# Altium PCB BeagleBone_Black_RevB4_V2.PcbDoc (part 2 of 3)
Units mm, origin at the board's own origin, x right, y up, seen from the top; angles counter-clockwise.
Board outline 100 x 100 mm, 2 copper layers (Top Layer, Bottom Layer); 274 components, 245 nets, 1313 pads, 251 vias.
Unrouted connection lines stored in the file: 891.
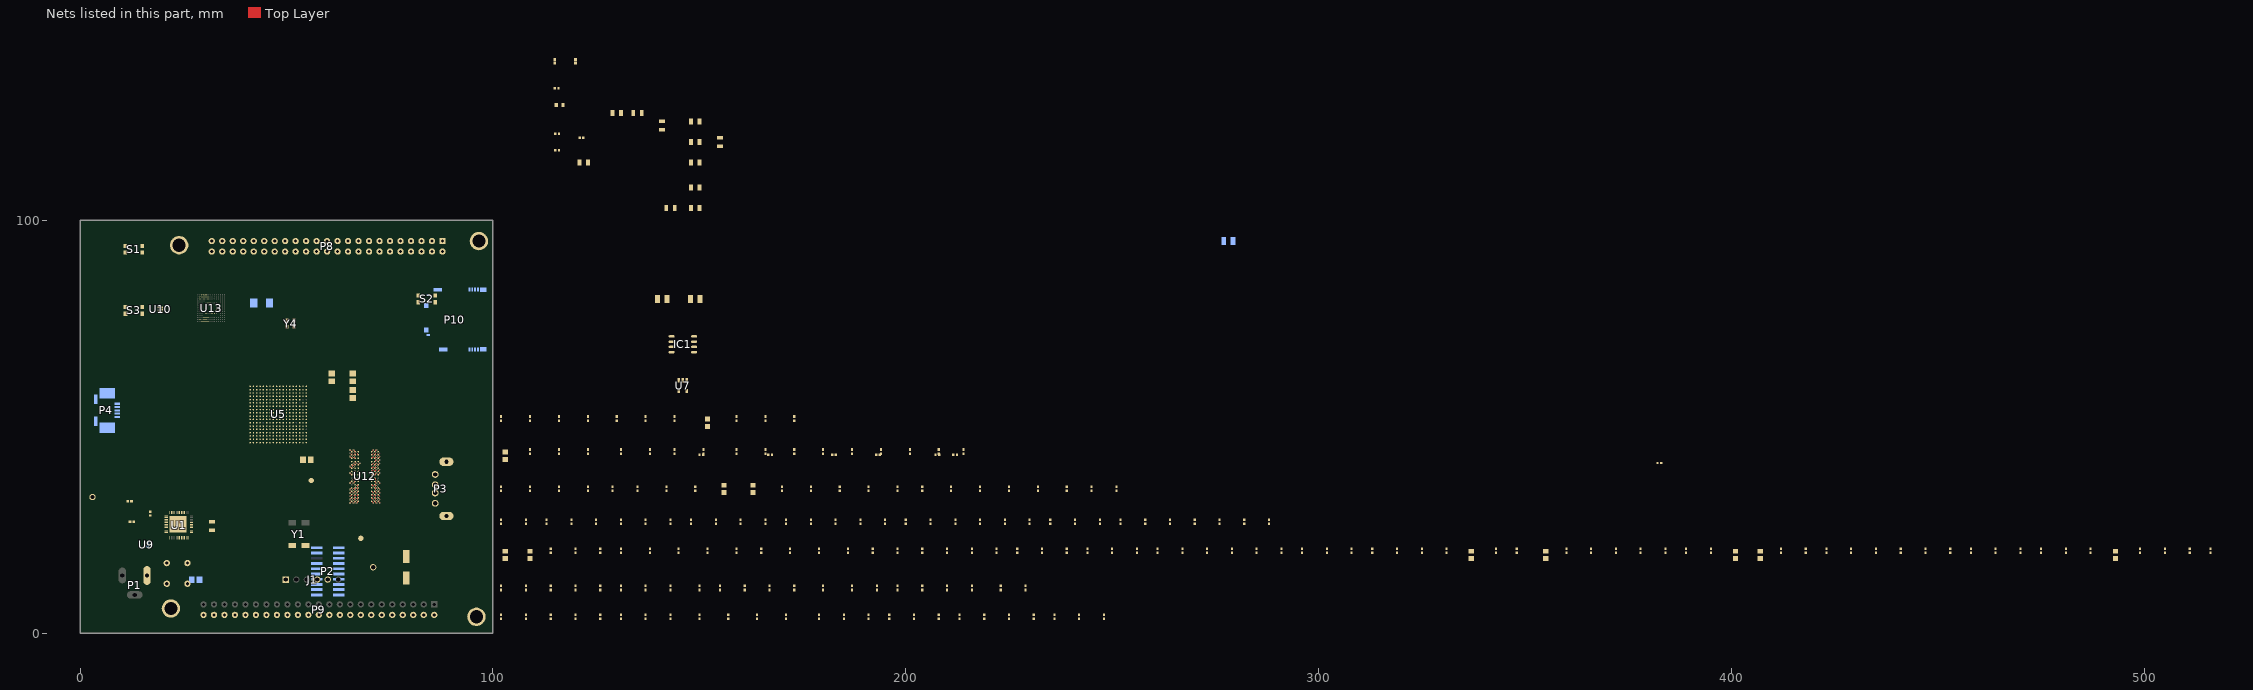
[diagram p2: the nets of this part, all layers, seen from the top]

## Part data (continued)
C27 C28 C29 C30 C31 C33 C35 C36 C37 C38 C41 C42 C43 C44 C45 C46 C47 C48 C49 C50 C51 C52 C53 C54 C56 C57 C58 C59 C60 C61 C63 C64 C65 C66 C67 C68 C69 C70 C71 C72 C73 C74 C75 C76 C78 C79 C80 C81 C82 C83 C84 C85 C86 C87 C88 C92 C93 C94 C97 C98 C99 C100 C101 C102 C103 C105 C106 C152 C154 C155 C158 C159: library part "CAP_0.1uF_X7R_16V_10% 0402", "CAP CER 0.1UF 6.3V 10% X5R 0402", Capacitance=0.1µF, Manufacturer="TDK Corporation", Manufacturer Part Number=C1005X5R0J104K050BA, Operating Temperature="-55°C ~ 85°C", Package / Case="0402 (1005 Metric)", Ratings=-, Supplier Part Number 1=445-1266-6-ND, Temperature Coefficient=X5R, Tolerance=±10%, Voltage - Rated=6.3V, Applications="General Purpose", Category=Capacitors, Features=-, Height - Seated (Max)=-, Lead Spacing=-, Lead Style=-, Mounting Type="Surface Mount, MLCC", Packaging=Digi-Reel®, Pricing 1="1=0.1, 10=0.026, 100=0.0121, 250=0.00992, 500=0.00848, 1000=0.0066, 5000=0.0055 (USD)", RoHS="RoHS Compliant", Size / Dimension="0.039\" L x 0.020\" W (1.00mm x 0.50mm)", Supplier 1=Digi-Key, Thickness (Max)="0.022\" (0.55mm)"
  C27 C28 C29 C158 C159: ComponentLink1Description=http://product.tdk.com/capacitor/mlcc/en/documents/mlcc_commercial_general_en.pdf, ComponentLink1URL=http://product.tdk.com/capacitor/mlcc/en/documents/mlcc_commercial_general_en.pdf, Stock 1=137886
  C30 C31 C33 C35 C36 C155: ComponentLink1Description=http://product.tdk.com/capacitor/mlcc/en/documents/mlcc_commercial_general_en.pdf, ComponentLink1URL=http://product.tdk.com/capacitor/mlcc/en/documents/mlcc_commercial_general_en.pdf, Stock 1=127604
  C37 C38 C41 C42 C43 C44 C45 C46 C47 C48 C49 C50 C51 C52 C53 C54 C56 C57 C58 C59 C60 C61 C63 C64 C65 C66 C67 C68 C69 C70 C71 C72 C73 C74 C75 C76 C78 C79 C80 C81 C82 C83 C84 C85 C86 C87 C88 C92 C93 C94 C97 C98 C99 C100 C101 C102 C103 C105 C106: ComponentLink1Description=http://www.kemet.com/datasheets&C0402C104K4RACTU, ComponentLink1URL=http://www.kemet.com/datasheets&C0402C104K4RACTU, Stock 1=127604
  C152 C154: ComponentLink1Description=http://product.tdk.com/capacitor/mlcc/en/documents/mlcc_commercial_general_en.pdf, ComponentLink1URL=http://product.tdk.com/capacitor/mlcc/en/documents/mlcc_commercial_general_en.pdf, Stock 1=127094
C32: library part CAP_0.001_X7R_50V_5%_0402, "CAP CER 1000PF 16V 10% X7R 0402", Capacitance=1000pF, Manufacturer=Yageo, Manufacturer Part Number=CC0402KRX7R7BB102, Operating Temperature="-55°C ~ 125°C", Package / Case="0402 (1005 Metric)", Ratings=-, Supplier Part Number 1=311-1352-6-ND, Temperature Coefficient=X7R, Tolerance=±10%, Voltage - Rated=16V, Applications="General Purpose", Category=Capacitors, ComponentLink1Description=http://www.yageo.com/documents/recent/UPY-GPHC_X7R_6.3V-to-50V_8.pdf, ComponentLink1URL=http://www.yageo.com/documents/recent/UPY-GPHC_X7R_6.3V-to-50V_8.pdf, Features=-, Height - Seated (Max)=-, Lead Spacing=-, Lead Style=-, Mounting Type="Surface Mount, MLCC", Packaging=Digi-Reel®, Pricing 1="1=0.1, 10=0.012, 25=0.0088, 100=0.0057, 250=0.00464, 500=0.00396, 1000=0.00309, 2500=0.00278, 5000=0.00258 (USD)", RoHS="RoHS Compliant", Size / Dimension="0.039\" L x 0.020\" W (1.00mm x 0.50mm)", Stock 1=394472, Supplier 1=Digi-Key, Thickness (Max)="0.022\" (0.55mm)"
C34: library part "CAP SMD", "CAP ALUM 100UF 6.3V 20% SMD", Capacitance=100µF, ESR (Equivalent Series Resistance)="4.64 Ohm", Lifetime @ Temp.="2000 Hrs @ 85°C", Manufacturer="Cornell Dubilier Electronics (CDE)", Manufacturer Part Number=AVE107M06D16T-F, Operating Temperature="-40°C ~ 85°C", Package / Case="Radial, Can - SMD", Ripple Current=120mA, Supplier Part Number 1=338-1787-6-ND, Tolerance=±20%, Voltage Rating=6.3V, Category=Capacitors, ComponentLink1Description=http://www.cde.com/catalogs/AVE.pdf, ComponentLink1URL=http://www.cde.com/catalogs/AVE.pdf, Features="General Purpose", Height - Seated (Max)="0.209\" (5.30mm)", Impedance=-, Lead Spacing=-, Mounting Type="Surface Mount", Packaging=Digi-Reel®, Pricing 1="1=0.17, 10=0.16, 100=0.133, 250=0.11844, 500=0.0987 (USD)", RoHS="RoHS Compliant", Size / Dimension="0.248\" Dia (6.30mm)", Stock 1=2601, Supplier 1=Digi-Key, Surface Mount Land Size="0.260\" L x 0.260\" W (6.60mm x 6.60mm)"
C39 C40 C55 C62 C77 C95 C96 C153: library part CAP_10uF_Y5V_10V_10%_0805, "CAP CER 10UF 10V Y5V 0805", Capacitance=10µF, Manufacturer="TDK Corporation", Manufacturer Part Number=C2012Y5V1A106Z, Operating Temperature="-30°C ~ 85°C", Package / Case="0805 (2012 Metric)", Ratings=-, Supplier Part Number 1=445-1371-6-ND, Temperature Coefficient="Y5V (F)", Tolerance="-20%, +80%", Voltage - Rated=10V, Applications="General Purpose", Category=Capacitors, ComponentLink1Description=http://media.digikey.com/pdf/Data%20Sheets/TDK%20PDFs/C_Series_GeneralAppl_B11.pdf, ComponentLink1URL=http://media.digikey.com/pdf/Data%20Sheets/TDK%20PDFs/C_Series_GeneralAppl_B11.pdf, Features=-, Height - Seated (Max)=-, Lead Spacing=-, Lead Style=-, Mounting Type="Surface Mount, MLCC", Packaging=Digi-Reel®, Pricing 1="1=0.15, 10=0.105, 100=0.0499, 250=0.042, 500=0.03518, 1000=0.02887 (USD)", RoHS="RoHS Compliant", Size / Dimension="0.079\" L x 0.049\" W (2.00mm x 1.25mm)", Stock 1=111942, Supplier 1=Digi-Key, Thickness (Max)="0.057\" (1.45mm)"
C107 C108 C109 C110 C111 C112 C113 C114 C115 C116 C117 C119 C120 C121 C124: library part CAP_0.01uf_X7R_16V_10%_0402, "CAP CER 0.1UF 6.3V 10% X5R 0402", Capacitance=0.1µF, Manufacturer="TDK Corporation", Manufacturer Part Number=C1005X5R0J104K050BA, Operating Temperature="-55°C ~ 85°C", Package / Case="0402 (1005 Metric)", Ratings=-, Supplier Part Number 1=445-1266-6-ND, Temperature Coefficient=X5R, Tolerance=±10%, Voltage - Rated=6.3V, Applications="General Purpose", Category=Capacitors, ComponentLink1Description=http://www.kemet.com/datasheets&C0402C104K4RACTU, ComponentLink1URL=http://www.kemet.com/datasheets&C0402C104K4RACTU, Features=-, Height - Seated (Max)=-, Lead Spacing=-, Lead Style=-, Mounting Type="Surface Mount, MLCC", Packaging=Digi-Reel®, Pricing 1="1=0.1, 10=0.026, 100=0.0121, 250=0.00992, 500=0.00848, 1000=0.0066, 5000=0.0055 (USD)", RoHS="RoHS Compliant", Size / Dimension="0.039\" L x 0.020\" W (1.00mm x 0.50mm)", Stock 1=127604, Supplier 1=Digi-Key, Thickness (Max)="0.022\" (0.55mm)"
C118 C122 C126: library part CAP_4.7uF_X5R_6.3V_10%_0603, "CAP CER 10UF 10V Y5V 0805", Capacitance=10µF, Manufacturer="TDK Corporation", Manufacturer Part Number=C2012Y5V1A106Z, Operating Temperature="-30°C ~ 85°C", Package / Case="0805 (2012 Metric)", Ratings=-, Supplier Part Number 1=445-1371-6-ND, Temperature Coefficient="Y5V (F)", Tolerance="-20%, +80%", Voltage - Rated=10V, Applications="General Purpose", Category=Capacitors, ComponentLink1Description=http://media.digikey.com/pdf/Data%20Sheets/TDK%20PDFs/C_Series_GeneralAppl_B11.pdf, ComponentLink1URL=http://media.digikey.com/pdf/Data%20Sheets/TDK%20PDFs/C_Series_GeneralAppl_B11.pdf, Features=-, Height - Seated (Max)=-, Lead Spacing=-, Lead Style=-, Mounting Type="Surface Mount, MLCC", Packaging=Digi-Reel®, Pricing 1="1=0.15, 10=0.105, 100=0.0499, 250=0.042, 500=0.03518, 1000=0.02887 (USD)", RoHS="RoHS Compliant", Size / Dimension="0.079\" L x 0.049\" W (2.00mm x 1.25mm)", Stock 1=102071, Supplier 1=Digi-Key, Thickness (Max)="0.057\" (1.45mm)"
C123: library part "CAP SMD", "CAP CER 1000PF 16V 10% X7R 0402", Capacitance=1000pF, Manufacturer=Yageo, Manufacturer Part Number=CC0402KRX7R7BB102, Operating Temperature="-55°C ~ 125°C", Package / Case="0402 (1005 Metric)", Ratings=-, Supplier Part Number 1=311-1352-6-ND, Temperature Coefficient=X7R, Tolerance=±10%, Voltage - Rated=16V, Applications="General Purpose", Category=Capacitors, ComponentLink1Description=http://www.yageo.com/documents/recent/UPY-GPHC_X7R_6.3V-to-50V_8.pdf, ComponentLink1URL=http://www.yageo.com/documents/recent/UPY-GPHC_X7R_6.3V-to-50V_8.pdf, Features=-, Height - Seated (Max)=-, Lead Spacing=-, Lead Style=-, Mounting Type="Surface Mount, MLCC", Packaging=Digi-Reel®, Pricing 1="1=0.1, 10=0.012, 25=0.0088, 100=0.0057, 250=0.00464, 500=0.00396, 1000=0.00309, 2500=0.00278, 5000=0.00258 (USD)", RoHS="RoHS Compliant", Size / Dimension="0.039\" L x 0.020\" W (1.00mm x 0.50mm)", Stock 1=391222, Supplier 1=Digi-Key, Thickness (Max)="0.022\" (0.55mm)"
C125: library part "CAP SMD", "CAP CER 2.2UF 6.3V 10% X5R 0402", Capacitance=2.2µF, Manufacturer="TDK Corporation", Manufacturer Part Number=C1005X5R0J225K050BC, Operating Temperature="-55°C ~ 85°C", Package / Case="0402 (1005 Metric)", Ratings=-, Supplier Part Number 1=445-6847-6-ND, Temperature Coefficient=X5R, Tolerance=±10%, Voltage - Rated=6.3V, Applications="General Purpose", Category=Capacitors, ComponentLink1Description=http://product.tdk.com/capacitor/mlcc/en/documents/mlcc_commercial_general_en.pdf, ComponentLink1URL=http://product.tdk.com/capacitor/mlcc/en/documents/mlcc_commercial_general_en.pdf, Features=-, Height - Seated (Max)=-, Lead Spacing=-, Lead Style=-, Mounting Type="Surface Mount, MLCC", Packaging=Digi-Reel®, Pricing 1="1=0.24, 10=0.2, 100=0.1, 250=0.075, 500=0.06626, 1000=0.05875, 5000=0.04875 (USD)", RoHS="RoHS Compliant", Size / Dimension="0.039\" L x 0.020\" W (1.00mm x 0.50mm)", Stock 1=186346, Supplier 1=Digi-Key, Thickness (Max)="0.022\" (0.55mm)"
C127 C128 C129 C130: library part "CAP SMD", "CAP CER 0.1UF 6.3V 10% X5R 0402", Capacitance=0.1µF, Manufacturer="TDK Corporation", Manufacturer Part Number=C1005X5R0J104K050BA, Operating Temperature="-55°C ~ 85°C", Package / Case="0402 (1005 Metric)", Ratings=-, Supplier Part Number 1=445-1266-6-ND, Temperature Coefficient=X5R, Tolerance=±10%, Voltage - Rated=6.3V, Applications="General Purpose", Category=Capacitors, ComponentLink1Description=http://product.tdk.com/capacitor/mlcc/en/documents/mlcc_commercial_general_en.pdf, ComponentLink1URL=http://product.tdk.com/capacitor/mlcc/en/documents/mlcc_commercial_general_en.pdf, Features=-, Height - Seated (Max)=-, Lead Spacing=-, Lead Style=-, Mounting Type="Surface Mount, MLCC", Packaging=Digi-Reel®, Pricing 1="1=0.1, 10=0.026, 100=0.0121, 250=0.00992, 500=0.00848, 1000=0.0066, 5000=0.0055 (USD)", RoHS="RoHS Compliant", Size / Dimension="0.039\" L x 0.020\" W (1.00mm x 0.50mm)", Stock 1=127604, Supplier 1=Digi-Key, Thickness (Max)="0.022\" (0.55mm)"
D1: library part LED_LTST-C150GKT, "LED GREEN CLEAR 0805 SMD", Color=Green, Current - Test=20mA, Luminous Flux @ Current - Test=-, Manufacturer="Lite-On Inc", Manufacturer Part Number=LTST-C170KGKT, Millicandela Rating=35mcd, Package / Case="0805 (2012 Metric)", Supplier Part Number 1=160-1414-6-ND, Voltage - Forward (Vf) Typ=2V, Category=Optoelectronics, CLASS=DISCRETE, ComponentLink1Description=http://optoelectronics.liteon.com/en-us/api/DwonloadFileHandler.ashx?txtSpecNo=DS22-2000-073&txtPartNo=LTST-C170KGKT, ComponentLink1URL=http://optoelectronics.liteon.com/en-us/api/DwonloadFileHandler.ashx?txtSpecNo=DS22-2000-073&txtPartNo=LTST-C170KGKT, Height=1.10mm, Lens Style/Size="Rectangle with Flat Top, 1.4mm x 1.25mm", Lens Type=Clear, Mounting Type="Surface Mount", Packaging=Digi-Reel®, Pricing 1="1=0.37, 10=0.267, 100=0.1574, 250=0.11136, 500=0.09504, 1000=0.07425 (USD)", RoHS="RoHS Compliant", Size / Dimension="2.00mm L x 1.25mm W", Stock 1=274890, Supplier 1=Digi-Key, TN=257-0020-000, Viewing Angle=130°, Wavelength - Dominant=571nm, Wavelength - Peak=574nm
FB1 FB2 FB3 FB7: library part FER_180_200_0, "FERRITE 800MA 150 OHM 0805 SMD", Current Rating=800mA, DC Resistance (DCR)="150 mOhm Max", Impedance @ Frequency="150 Ohm @ 100MHz", Manufacturer="Laird-Signal Integrity Products", Manufacturer Part Number=LI0805H151R-10, Mfr=Steward, Package / Case="0805 (2012 Metric)", PartName=FerriteBead150ohm800mA, Supplier Part Number 1=240-2384-6-ND, TIIntPartnumber=1L0010, Category=Filters, ComponentLink1Description=http://www.lairdtech.com/WorkArea/linkit.aspx?LinkIdentifier=id&ItemID=4912, ComponentLink1URL=http://www.lairdtech.com/WorkArea/linkit.aspx?LinkIdentifier=id&ItemID=4912, Filter Type="Differential Mode - Single", Height (Max)="0.043\" (1.10mm)", MfrNum=LI0805H151R-10, Mounting Type="Surface Mount", Packaging=Digi-Reel®, Pricing 1="1=0.1, 10=0.07, 25=0.064, 50=0.0574, 100=0.0421, 250=0.03064, 500=0.02808, 1000=0.02424 (USD)", RoHS="RoHS Compliant", Size / Dimension="0.079\" L x 0.049\" W (2.00mm x 1.25mm)", Stock 1=3694, Supplier 1=Digi-Key, Vendor=Digikey
FB8: library part FER_180_200_0, "RES .10 OHM 1/8W 5% 0805", Manufacturer="CTS Resistor Products", Manufacturer Part Number=73L3R10J, Package / Case="0805 (2012 Metric)", Power (Watts)="0.125W, 1/8W", Resistance (Ohms)=0.1, Supplier Device Package=0805, Supplier Part Number 1=73L3R10JDKR-ND, Temperature Coefficient=±200ppm/°C, Tolerance=±5%, Category=Resistors, ComponentLink1Description=http://www.ctscorp.com/components/Datasheets/008-0337-0.pdf, ComponentLink1URL=http://www.ctscorp.com/components/Datasheets/008-0337-0.pdf, Composition="Thick Film", Features="Current Sense", Height="0.026\" (0.65mm)", Number of Terminations=2, Packaging=Digi-Reel®, Pricing 1="1=0.1, 10=0.066, 100=0.0267, 250=0.0204, 500=0.01632, 1000=0.01201 (USD)", RoHS="RoHS Compliant", Size / Dimension="0.079\" L x 0.049\" W (2.00mm x 1.25mm)", Stock 1=1186, Supplier 1=Digi-Key
IC1: "LDO Voltage Regulator", Current - Limit (Min)=-, Current - Output="500mA (Max)", Manufacturer="Texas Instruments", Manufacturer Part Number=TL5209DR, Operating Temperature="-40°C ~ 125°C", Package / Case="8-SOIC (0.154\", 3.90mm Width)", Supplier Device Package=8-SOIC, Supplier Part Number 1=296-21569-6-ND, Voltage - Dropout (Typical)="0.35V @ 500mA", Voltage - Input="2.5 V ~ 16 V", Voltage - Output="2.5 V ~ 6.5 V", Category="Integrated Circuits (ICs)", ComponentLink1Description=http://media.digikey.com/pdf/Data%20Sheets/Texas%20Instruments%20PDFs/TL5209.pdf, ComponentLink1URL=http://media.digikey.com/pdf/Data%20Sheets/Texas%20Instruments%20PDFs/TL5209.pdf, Mounting Type="Surface Mount", Number of Regulators=1, Packaging=Digi-Reel®, Pricing 1="1=1.41, 10=1.244, 25=1.1232, 100=0.9828, 250=0.86192, 500=0.7644, 1000=0.6045 (USD)", Regulator Topology="Positive Adjustable", RoHS="RoHS Compliant", Stock 1=7190, Supplier 1=Digi-Key
J1: library part HDR_6x1, "CONN HEADER 6POS, VERTICAL,  .100 STR TIN", Color=Black, Manufacturer="Samtec Inc", Manufacturer Part Number=FTR-110-03-G-D-06, Supplier Part Number 1=FTR-110-03-G-D-06-ND, Category="Connectors, Interconnects", ComponentLink1Description=http://www.samtec.com/documents/webfiles/cpdf/FTR-1XX-XX-XX-D-X-XX-MKT.pdf, ComponentLink1URL=http://www.samtec.com/documents/webfiles/cpdf/FTR-1XX-XX-XX-D-X-XX-MKT.pdf, Connector Type=Unshrouded, Contact Finish=Gold, Contact Finish Thickness="10µin (0.25µm)", Contact Mating Length="0.125\" (3.18mm)", Features=-, Height Stacking (Mating)=-, Molding Height Above Board="0.100\" (2.54mm)", Mounting Type="Surface Mount", Number of Positions=20, Number of Positions Loaded=19, Number of Rows=2, Packaging=Tube, Pitch="0.050\" (1.27mm)", Pricing 1="1=4.47 (USD)", RoHS="RoHS Compliant", Row Spacing="0.100\" (2.54mm)", Stock 1=0, Supplier 1=Digi-Key, Termination=Solder
L1: library part IND_2.2uH_2.6A_10%_SMD, "Inductor 2.2uH smt 2.6A, 58 milliohm", Current - Saturation=-, Current Rating=1.3A, DC Resistance (DCR)="100 mOhm Max", Frequency - Self Resonant=40MHz, Frequency - Test=1MHz, Inductance=2.2µH, Manufacturer="Murata Electronics North America", Manufacturer Part Number=LQM2HPN2R2MG0L, Operating Temperature="-55°C ~ 125°C", Package / Case="1008 (2520 Metric)", Supplier Part Number 1=490-5114-6-ND, Tolerance=±20%, Category="Inductors, Coils, Chokes", ComponentLink1Description=http://search.murata.co.jp/Ceramy/image/img/PDF/ENG/L0075S0104LQM2HP_G0.pdf, ComponentLink1URL=http://search.murata.co.jp/Ceramy/image/img/PDF/ENG/L0075S0104LQM2HP_G0.pdf, Material - Core=-, Mounting Type="Surface Mount", Packaging=Digi-Reel®, Pricing 1="1=0.34, 10=0.307, 25=0.2728, 50=0.2388, 100=0.2217, 250=0.2046, 500=0.19438, 750=0.17732, 1000=0.15686 (USD)", Q @ Freq=-, RoHS="RoHS Compliant", Shielding=Shielded, Size / Dimension="0.098\" L x 0.079\" W x 0.035\" H (2.50mm x 2.00mm x 0.90mm)", Stock 1=4689, Supplier 1=Digi-Key, Type=-
L2 L3: library part IND_2.2uH_2.6A_10%_SMD, "INDUCTOR 2.2UH 20% 1300MA 1008", Current - Saturation=-, Current Rating=1.3A, DC Resistance (DCR)="100 mOhm Max", Frequency - Self Resonant=40MHz, Frequency - Test=1MHz, Inductance=2.2µH, Manufacturer="Murata Electronics North America", Manufacturer Part Number=LQM2HPN2R2MG0L, Mfr=TDK, MfrNum=VLCF5020T-2R2N2R6-3, Operating Temperature="-55°C ~ 125°C", Package / Case="1008 (2520 Metric)", PartName=2.2uH10%2.6Asmd, Supplier Part Number 1=490-5114-6-ND, TIIntPartnumber=1L0025, Tolerance=±20%, Category="Inductors, Coils, Chokes", ComponentLink1Description=http://www.tdk.co.jp/tefe02/e531_vlcf.pdf, ComponentLink1URL=http://www.tdk.co.jp/tefe02/e531_vlcf.pdf, Cost10K=0.37, Cost100=1.11, Material - Core=-, Mounting Type="Surface Mount", Packaging=Digi-Reel®, Pricing 1="1=0.34, 10=0.307, 25=0.2728, 50=0.2388, 100=0.2217, 250=0.2046, 500=0.19438, 750=0.17732, 1000=0.15686 (USD)", Q @ Freq=-, RoHS="RoHS Compliant", Shielding=Shielded, Size / Dimension="0.098\" L x 0.079\" W x 0.035\" H (2.50mm x 2.00mm x 0.90mm)", Stock 1=4689, Supplier 1=Digi-Key, Type=-, Vendor=Digikey
P1: library part Power_Jack, "CONN PWR JACK 2.1X5.5MM HIGH CUR", Color=Black, Current Rating=5A, Manufacturer="CUI Inc", Manufacturer Part Number=PJ-002AH, Operating Temperature="-25°C ~ 85°C", Supplier Part Number 1=CP-002AH-ND, Category="Connectors, Interconnects", ComponentLink1Description=http://www.cui.com/Product/Resource/DigiKeyPDF/PJ-002AH.pdf, ComponentLink1URL=http://www.cui.com/Product/Resource/DigiKeyPDF/PJ-002AH.pdf, Connector Type=Jack, Contact Material="Copper Alloy", Contact Material - Plating=Nickel, Features=-, Gender=Male, Housing Color=Black, Housing Material=Thermoplastic, Internal Switch(s)="Single Switch, Normally Closed", Mounting Type="Through Hole, Right Angle", Number of Positions/Contacts="2 Conductors, 3 Contacts", Plug/Mating Plug Diameter="2.1mm ID, 5.5mm OD", Pricing 1="1=1.01, 10=0.704, 100=0.4724, 500=0.3819, 1000=0.3417, 2500=0.27135 (USD)", RoHS="RoHS Compliant", Shielding=Unshielded, Stock 1=81962, Supplier 1=Digi-Key, Termination="Solder Eyelet(s)"
P2: library part HDR_10x2_CJTAG, "Dual Line Header 10x2pin Tin", Color=Black, Manufacturer="Samtec Inc", Manufacturer Part Number=FTR-110-03-G-D-06, Supplier Part Number 1=FTR-110-03-G-D-06-ND, Category="Connectors, Interconnects", ComponentLink1Description=http://www.samtec.com/documents/webfiles/cpdf/FTR-1XX-XX-XX-D-X-XX-MKT.pdf, ComponentLink1URL=http://www.samtec.com/documents/webfiles/cpdf/FTR-1XX-XX-XX-D-X-XX-MKT.pdf, Connector Type=Unshrouded, Contact Finish=Gold, Contact Finish Thickness="10µin (0.25µm)", Contact Mating Length="0.125\" (3.18mm)", Features=-, Height Stacking (Mating)=-, Molding Height Above Board="0.100\" (2.54mm)", Mounting Type="Surface Mount", Number of Positions=20, Number of Positions Loaded=19, Number of Rows=2, Packaging=Tube, Pitch="0.050\" (1.27mm)", Pricing 1="1=4.47 (USD)", RoHS="RoHS Compliant", Row Spacing="0.100\" (2.54mm)", Stock 1=0, Supplier 1=Digi-Key, Termination=Solder
P3: library part CONN_54819-0578_2, "CONN RCPT USB TYPE A R/A PCB", Manufacturer=FCI, Manufacturer Part Number=87520-0010BLF, Supplier Part Number 1=609-1045-ND, Category="Connectors, Interconnects", CLASS=IO, ComponentLink1Description=http://portal.fciconnect.com/Comergent//fci/drawing/87520.pdf, ComponentLink1URL=http://portal.fciconnect.com/Comergent//fci/drawing/87520.pdf, Connector Type="USB - A", Features="Board Lock", Gender=Receptacle, Ingress Protection=-, Mounting Type="Through Hole, Right Angle, Horizontal", Number of Contacts=4, Packaging=Tube, Pricing 1="1=0.78, 10=0.734, 25=0.6604, 50=0.587, 100=0.5626, 250=0.51368, 500=0.4892, 1000=0.40359, 2500=0.3669 (USD)", RoHS="RoHS Compliant", Specifications="USB 2.0", Stock 1=4363, Supplier 1=Digi-Key, TN=224-0234-000
P4: library part MINI-USB-AB-SOCKET, "CONN RCPT USB MINI B R/A SMD", Manufacturer=KYCON, Manufacturer 2=AMP, Manufacturer Part Number=0565790576, Supplier Part Number 1=WM17122DKR-ND, ATLStockNo1=4500.0223, Category="Connectors, Interconnects", ComponentLink1Description=http://www.molex.com/pdm_docs/sd/565790576_sd.pdf, ComponentLink1URL=http://www.molex.com/pdm_docs/sd/565790576_sd.pdf, Connector Type="USB - mini AB", Distributor=Deltron, Distributor 2=Tyco, Features=Shielded, Gender=Receptacle, Ingress Protection=-, Mounting Type="Surface Mount, Right Angle, Horizontal", Number of Contacts=5, Order#=KMAB-SMT-5S-S-30TR, Order# 2=C-440247, Packaging=Digi-Reel®, Pricing 1="1=2.92, 10=2.649, 25=2.4872, 50=2.3792, 100=2.271, 250=2.05468 (USD)", RoHS="RoHS Compliant", Specifications="USB 2.0 OTG", Stock 1=12426, Supplier 1=Digi-Key
P8 P9: library part HDR_46_F_2_0.1_0.1, "CONN HEADER FMAL 46PS.1\" DL GOLD", Color=Black, Manufacturer="Sullins Connector Solutions", Manufacturer Part Number=PPPC232LFBN-RC, Supplier Part Number 1=S7126-ND, Category="Connectors, Interconnects", ComponentLink1Description=http://www.sullinscorp.com/drawings/78_P(N)PxCxxxLFBN-RC,_10492-G.pdf, ComponentLink1URL=http://www.sullinscorp.com/drawings/78_P(N)PxCxxxLFBN-RC,_10492-G.pdf, Connector Type=Header, Contact Finish=Gold, Contact Finish Thickness=Flash, Contact Type="Female Socket", Fastening Type=-, Features=-, Mounting Type="Through Hole", Number of Positions=46, Number of Positions Loaded=All, Number of Rows=2, Packaging=Bulk, Pitch="0.100\" (2.54mm)", Pricing 1="1=2.75, 10=2.325, 25=2.2196, 50=2.0084, 100=1.7969, 250=1.58552, 500=1.4798, 1000=1.3741, 2500=1.32125 (USD)", RoHS="RoHS Compliant", Row Spacing="0.100\" (2.54mm)", Stock 1=750, Supplier 1=Digi-Key, Termination=Solder
P10: library part microSD_CONN_2, "CONN MICRO SD R/A PUSH-PUSH SMD", Manufacturer="Molex Inc", Manufacturer Part Number=5025700893, Supplier Part Number 1=WM19093TR-ND, Card Type="Secure Digital - microSD™ TransFlash", Category="Connectors, Interconnects", ComponentLink1Description=http://www.molex.com/pdm_docs/sd/5025700893_sd.pdf, ComponentLink1URL=http://www.molex.com/pdm_docs/sd/5025700893_sd.pdf, Connector Type="Connector and Ejector", Contact Finish=Gold, Contact Finish Thickness="20µin (0.51µm)", Ejector Side=-, Features=Switch, Height Above Board="0.071\" (1.80mm)", Insertion, Removal Method="Push In, Push Out", Mounting Feature="Normal, Standard - Top", Mounting Type="Surface Mount, Right Angle", Number of Positions="10 (8 + 2)", Packaging="Tape & Reel (TR)", Pricing 1="1300=2.16645, 2600=2.01703, 6500=1.94233 (USD)", RoHS="RoHS Compliant", Stock 1=16900, Supplier 1=Digi-Key
R1: library part RES_100k, "Resistor 100kOhm 0402 SMD", Case/Package=0402, Case Code (Metric)=1005, Manufacturer=Yageo, Max Operating Temperature=155°C, Max Power Dissipation=63mW, Min Operating Temperature=-55°C, Package Quantity=1, Resistance=100k, Supplier Part Number 1=603-RC0402FR-07100KL, Temperature Coefficient=100ppm/°C, Tolerance=1%, Voltage Rating=50V, Case Code (Imperial)=0402, ComponentLink2Description=Datasheet, ComponentLink2URL=https://www.yageo.com/upload/media/product/productsearch/datasheet/rchip/PYu-RC_Group_51_RoHS_L_10.pdf, Composition="Thick Film", Depth=0.5mm, Features="Moisture Resistant", Height=0.016inch, Lead Free="Lead Free", Length=0.039inch, Manufacturer Part Number=RC0402FR-07100KL, Military Standard=Not, Number of Terminations=2, Packaging="Tape and Reel", Power Rating=63mW, REACH SVHC="No SVHC", RoHS=Yes, Supplier 1=Mouser, Supplier 2=Digi-Key, Supplier Part Number 2=311-100KLRCT-ND, Termination=SMD/SMT, Width=0.02inch, Working Voltage=50V
R2 R3: library part RES_1.5k, "Resistor 1.5kOhm 0402 SMD", Case/Package=0402, Case Code (Metric)=1005, Manufacturer=Yageo, Max Operating Temperature=155°C, Max Power Dissipation=63mW, Min Operating Temperature=-55°C, Package Quantity=1, Power Rating=62.5mW, Resistance=1.5k, Supplier Part Number 1=311-1.50KLRCT-ND, Temperature Coefficient=100ppm/°C, Tolerance=1%, Voltage Rating=50V, Case Code (Imperial)=0402, ComponentLink1Description=Datasheet, ComponentLink1URL=https://www.yageo.com/upload/media/product/productsearch/datasheet/rchip/PYu-RC_Group_51_RoHS_L_10.pdf, Composition="Thick Film", Depth=0.5mm, Features="Moisture Resistant", Height=0.016inch, Lead Free="Lead Free", Length=1mm, Manufacturer Part Number=RC0402FR-071K5L, Military Standard=Not, Number of Terminations=2, Packaging="Tape and Reel", REACH SVHC="No SVHC", RoHS=Yes, Supplier 1=Digi-Key, Supplier 2=Mouser, Supplier Part Number 2=603-RC0402FR-071K5L, Termination=SMD/SMT, Width=0.02inch
R4 R5 R6 R7: library part RES_0, "Resistor 0Ohm 0402 SMD", Case/Package=0402, Case Code (Metric)=1005, Manufacturer=Yageo, Max Operating Temperature=155°C, Max Power Dissipation=63mW, Min Operating Temperature=-55°C, Package Quantity=1, Power Rating=62.5mW, Resistance=0, Supplier Part Number 1=311-0.0JRCT-ND, Temperature Coefficient=200ppm/°C, Tolerance=5%, Voltage Rating=50V, Case Code (Imperial)=0402, ComponentLink1Description=Digikey, ComponentLink1URL=https://www.digikey.com/product-detail/en/yageo/RC0402JR-070RL/311-0.0JRCT-ND/729353, ComponentLink2Description=Datasheet, ComponentLink2URL=https://www.yageo.com/upload/media/product/productsearch/datasheet/rchip/PYu-RC_Group_51_RoHS_L_10.pdf, Composition="Thick Film", Contact Plating=Tin,Matte, Depth=0.5mm, Features="Moisture Resistant", Height=0.016inch, Lead Free="Lead Free", Length=1mm, Manufacturer Part Number=RC0402JR-070RL, Military Standard=Not, Number of Terminations=2, Packaging="Tape and Reel", Pricing 1="1=0.10000, 10=0.01300, 25=0.00920, 50=0.00700, 100=0.00510, 250=0.00392, 500=0.00312, 1000=0.00230, 5000=0.00165 (USD)", Radiation Hardening=No, REACH SVHC=Unknown, RoHS=Yes, Stock 1=68160806, Supplier 1=Digi-Key, Termination=SMD/SMT, Width=0.02inch
R8: library part RES_0, "Resistor 0Ohm 0402 SMD", Case/Package=0402, Case Code (Metric)=1005, Manufacturer=Yageo, Max Operating Temperature=155°C, Max Power Dissipation=63mW, Min Operating Temperature=-55°C, Package Quantity=1, Power Rating=62.5mW, Resistance=0/DNI, Supplier Part Number 1=311-0.0JRCT-ND, Temperature Coefficient=200ppm/°C, Tolerance=5%, Voltage Rating=50V, Case Code (Imperial)=0402, ComponentLink1Description=Digikey, ComponentLink1URL=https://www.digikey.com/product-detail/en/yageo/RC0402JR-070RL/311-0.0JRCT-ND/729353, ComponentLink2Description=Datasheet, ComponentLink2URL=https://www.yageo.com/upload/media/product/productsearch/datasheet/rchip/PYu-RC_Group_51_RoHS_L_10.pdf, Composition="Thick Film", Contact Plating=Tin,Matte, Depth=0.5mm, Features="Moisture Resistant", Height=0.016inch, Lead Free="Lead Free", Length=1mm, Manufacturer Part Number=RC0402JR-070RL, Military Standard=Not, Number of Terminations=2, Packaging="Tape and Reel", Pricing 1="1=0.10000, 10=0.01300, 25=0.00920, 50=0.00700, 100=0.00510, 250=0.00392, 500=0.00312, 1000=0.00230, 5000=0.00165 (USD)", Radiation Hardening=No, REACH SVHC=Unknown, RoHS=Yes, Stock 1=68160806, Supplier 1=Digi-Key, Termination=SMD/SMT, Width=0.02inch
R9: library part RES_820, "Resistor 820Ohm 0402 SMD", Case/Package=0402, Case Code (Metric)=1005, Manufacturer=Yageo, Max Operating Temperature=155°C, Max Power Dissipation=63mW, Min Operating Temperature=-55°C, Package Quantity=1, Resistance=820, Supplier Part Number 1=311-820LRCT-ND, Temperature Coefficient=100ppm/°C, Tolerance=1%, Voltage Rating=50V, Case Code (Imperial)=0402, Composition="Thick Film", Depth=0.5mm, Features="Moisture Resistant", Height=0.016inch, Lead Free="Lead Free", Length=1mm, Manufacturer Part Number=RC0402FR-07820RL, Military Standard=Not, Number of Terminations=2, Packaging="Tape and Reel", Power Rating=63mW, Pricing 1="1=0.10000, 10=0.01600, 100=0.00640, 1000=0.00289, 2500=0.00251, 5000=0.00207 (USD)", REACH SVHC=Unknown, RoHS=Yes, Stock 1=1640857, Supplier 1=Digi-Key, Termination=SMD/SMT, Width=0.5mm
R10: library part RES_470k, "Resistor 470kOhm 0402 SMD", Case/Package=0402, Case Code (Metric)=1005, Manufacturer=Yageo, Max Operating Temperature=155°C, Max Power Dissipation=63mW, Min Operating Temperature=-55°C, Package Quantity=1, Power Rating=62.5mW, Resistance=470k, Supplier Part Number 1=311-470KLRCT-ND, Temperature Coefficient=100ppm/°C, Tolerance=1%, Voltage Rating=50V, Case Code (Imperial)=0402, ComponentLink1Description=Datasheet, ComponentLink1URL=https://www.yageo.com/upload/media/product/productsearch/datasheet/rchip/PYu-RC_Group_51_RoHS_L_10.pdf, Composition="Thick Film", Depth=0.5mm, Features="Moisture Resistant", Height=0.016inch, Lead Free="Lead Free", Length=1mm, Manufacturer Part Number=RC0402FR-07470KL, Military Standard=Not, Number of Pins=2, Number of Terminations=2, Packaging="Tape and Reel", Pricing 1="1=0.10000, 10=0.01600, 100=0.00640, 1000=0.00289, 2500=0.00251, 5000=0.00207 (USD)", REACH SVHC="No SVHC", RoHS=Yes, Stock 1=2249859, Supplier 1=Digi-Key, Termination=SMD/SMT, Voltage Rating (DC)=50V, Width=0.02inch
R11: library part RES_280k, "Resistor 280kOhm 0402 SMD", Case/Package=0402, Case Code (Metric)=1005, Manufacturer=Yageo, Max Operating Temperature=155°C, Max Power Dissipation=63mW, Min Operating Temperature=-55°C, Power Rating=62.5mW, Resistance=280k, Supplier Part Number 1=YAG3087CT-ND, Temperature Coefficient=100ppm/°C, Tolerance=1%, Voltage Rating=50V, Case Code (Imperial)=0402, ComponentLink1Description=Datasheet, ComponentLink1URL=https://www.yageo.com/upload/media/product/productsearch/datasheet/rchip/PYu-RC_Group_51_RoHS_L_10.pdf, Composition="Thick Film", Contact Plating=Tin,Matte,Lead, Depth=0.5mm, Features="Moisture Resistant", Height=0.016inch, Lead Free="Lead Free", Length=1mm, Manufacturer Part Number=RC0402FR-07280KL, Military Standard=Not, Number of Terminations=2, Packaging="Tape and Reel", Pricing 1="1=0.10000, 10=0.01600, 100=0.00640, 1000=0.00289, 2500=0.00251, 5000=0.00207 (USD)", Radiation Hardening=No, RoHS=Yes, Stock 1=1301983, Supplier 1=Digi-Key, Termination=SMD/SMT, Voltage Rating (DC)=50V, Width=0.5mm
R14 R54 R96 R98 R100 R101 R102 R103 R104 R105 R106 R107 R108 R109 R110 R111 R150 R151 R152 R153 R154 R155 R156 R157: library part RES_10K_1/16W_1%_0402, "RES 10K OHM 1/16W 5% 0402 SMD", Manufacturer="Rohm Semiconductor", Manufacturer Part Number=MCR01MZPJ103, Package / Case="0402 (1005 Metric)", Power (Watts)="0.063W, 1/16W", Resistance (Ohms)=10k, Supplier Part Number 1=RHM10KJDKR-ND, Temperature Coefficient=±200ppm/°C, Tolerance=±5%, Category=Resistors, ComponentLink1Description=http://rohmfs.rohm.com/en/products/databook/datasheet/passive/resistor/chip_resistor/mcr_a.pdf, ComponentLink1URL=http://rohmfs.rohm.com/en/products/databook/datasheet/passive/resistor/chip_resistor/mcr_a.pdf, Composition="Thick Film", Features="Automotive AEC-Q200 Qualified", Height="0.016\" (0.40mm)", Number of Terminations=2, Packaging=Digi-Reel®, Pricing 1="1=0.1, 10=0.019, 25=0.014, 100=0.0078, 250=0.00596, 500=0.00476, 1000=0.0035, 5000=0.00251 (USD)", RoHS="RoHS Compliant", Size / Dimension="0.039\" L x 0.020\" W (1.00mm x 0.50mm)", Stock 1=110842, Supplier 1=Digi-Key, Supplier Device Package="0402 (1005 Metric)"
R17: library part RES_1M_1/16W_1%_0402, "Resistor 1Mohm 1/16W 1% 0402", Manufacturer="Stackpole Electronics Inc", Manufacturer Part Number=RMCF0402FT1M00, Package / Case="0402 (1005 Metric)", Power (Watts)="0.063W, 1/16W", Resistance (Ohms)=1M, Supplier Device Package=0402, Supplier Part Number 1=RMCF0402FT1M00DKR-ND, Temperature Coefficient=±100ppm/°C, Tolerance=±1%, Category=Resistors, ComponentLink1Description=http://www.seielect.com/Catalog/SEI-RMCF_RMCP.pdf, ComponentLink1URL=http://www.seielect.com/Catalog/SEI-RMCF_RMCP.pdf, Composition="Thick Film", Features=-, Height="0.016\" (0.40mm)", Number of Terminations=2, Packaging=Digi-Reel®, Pricing 1="1=0.04, 10=0.025, 50=0.0138, 100=0.0105, 250=0.0078, 500=0.00576, 1000=0.00384, 2500=0.00324, 5000=0.0027 (USD)", RoHS="RoHS Compliant", Size / Dimension="0.039\" L x 0.020\" W (1.00mm x 0.50mm)", Stock 1=175650, Supplier 1=Digi-Key
R18 R21 R28 R45 R46 R47 R48 R167: library part RES_33_0402, "RES 33 OHM 1/16W 5% 0402 SMD", Manufacturer="Panasonic Electronic Components", Manufacturer Part Number=ERJ-2GEJ330X, Package / Case="0402 (1005 Metric)", Power (Watts)="0.1W, 1/10W", Resistance (Ohms)=33, Supplier Device Package=0402, Supplier Part Number 1=P33JDKR-ND, Temperature Coefficient=±200ppm/°C, Tolerance=±5%, Category=Resistors, ComponentLink1Description=http://industrial.panasonic.com/www-cgi/jvcr13pz.cgi?E+PZ+3+AOA0001+ERJ2GEJ330X+7+WW, ComponentLink1URL=http://industrial.panasonic.com/www-cgi/jvcr13pz.cgi?E+PZ+3+AOA0001+ERJ2GEJ330X+7+WW, Composition="Thick Film", Features=-, Height="0.016\" (0.40mm)", Number of Terminations=2, Packaging=Digi-Reel®, Pricing 1="1=0.1, 50=0.0172, 100=0.0131, 250=0.00976, 500=0.0072, 1000=0.0048, 5000=0.00338 (USD)", RoHS="RoHS Compliant", Size / Dimension="0.039\" L x 0.020\" W (1.00mm x 0.50mm)", Stock 1=5879945, Supplier 1=Digi-Key
R19 R20 R27 R49 R50 R51 R159 R160 R161 R162: library part RES_0_1/16W_1%_0402, "RES 0.0 OHM 1/16W 0402 SMD", Manufacturer=Yageo, Manufacturer Part Number=RC0402JR-070RL, Package / Case="0402 (1005 Metric)", Power (Watts)="0.063W, 1/16W", Resistance (Ohms)=0.0, Supplier Device Package=0402, Supplier Part Number 1=311-0.0JRDKR-ND, Temperature Coefficient=-, Tolerance=Jumper, Category=Resistors, ComponentLink1Description=http://www.yageo.com/documents/recent/PYu-RC0402_51_RoHS_L_6.pdf, ComponentLink1URL=http://www.yageo.com/documents/recent/PYu-RC0402_51_RoHS_L_6.pdf, Composition="Thick Film", Features=-, Height="0.016\" (0.40mm)", Number of Terminations=2, Packaging=Digi-Reel®, Pricing 1="1=0.1, 10=0.012, 25=0.0092, 100=0.0055, 250=0.00476, 500=0.00336, 1000=0.00237, 2500=0.00206, 5000=0.00178 (USD)", RoHS="RoHS Compliant", Size / Dimension="0.039\" L x 0.020\" W (1.00mm x 0.50mm)", Stock 1=4904429, Supplier 1=Digi-Key
R22: library part RES_4.7K_0402, "RES 49.9 OHM 1/16W 1% 0402 SMD", Manufacturer=Yageo, Manufacturer Part Number=RC0402FR-0749R9L, Package / Case="0402 (1005 Metric)", Power (Watts)="0.063W, 1/16W", Resistance (Ohms)=49.9, Supplier Device Package=0402, Supplier Part Number 1=311-49.9LRDKR-ND, Temperature Coefficient=±100ppm/°C, Tolerance=±1%, Category=Resistors, ComponentLink1Description=http://www.yageo.com/documents/recent/PYu-RC0402_51_RoHS_L_6.pdf, ComponentLink1URL=http://www.yageo.com/documents/recent/PYu-RC0402_51_RoHS_L_6.pdf, Composition="Thick Film", Features=-, Height="0.016\" (0.40mm)", Number of Terminations=2, Packaging=Digi-Reel®, Pricing 1="1=0.1, 10=0.014, 25=0.0104, 100=0.0063, 250=0.0054, 500=0.00382, 1000=0.0027, 2500=0.00234, 5000=0.00203 (USD)", RoHS="RoHS Compliant", Size / Dimension="0.039\" L x 0.020\" W (1.00mm x 0.50mm)", Stock 1=1338786, Supplier 1=Digi-Key
R23 R24 R25: library part RES_4.7K_0402, "RES 4.75K 1/16W 1% 0402 SMD", Manufacturer="Stackpole Electronics Inc", Manufacturer Part Number=RMCF0402FT4K75, Package / Case="0402 (1005 Metric)", Power (Watts)="0.063W, 1/16W", Resistance (Ohms)=4.75k, Supplier Device Package=0402, Supplier Part Number 1=RMCF0402FT4K75DKR-ND, Temperature Coefficient=±100ppm/°C, Tolerance=±1%, Category=Resistors, ComponentLink1Description=http://www.seielect.com/Catalog/SEI-RMCF_RMCP.pdf, ComponentLink1URL=http://www.seielect.com/Catalog/SEI-RMCF_RMCP.pdf, Composition="Thick Film", Features=-, Height="0.016\" (0.40mm)", Number of Terminations=2, Packaging=Digi-Reel®, Pricing 1="1=0.04, 10=0.025, 50=0.0138, 100=0.0105, 250=0.0078, 500=0.00576, 1000=0.00384, 2500=0.00324, 5000=0.0027 (USD)", RoHS="RoHS Compliant", Size / Dimension="0.039\" L x 0.020\" W (1.00mm x 0.50mm)", Stock 1=280611, Supplier 1=Digi-Key
R26 R163 R164: library part RES_4.75K_1/16W_1%_0402, "RES 4.75K OHM 1/16W 1% 0402 SMD", Manufacturer="Stackpole Electronics Inc", Manufacturer Part Number=RMCF0402FT4K75, Package / Case="0402 (1005 Metric)", Power (Watts)="0.063W, 1/16W", Resistance (Ohms)=4.75k, Supplier Device Package=0402, Supplier Part Number 1=RMCF0402FT4K75DKR-ND, Temperature Coefficient=±100ppm/°C, Tolerance=±1%, Category=Resistors, ComponentLink1Description=http://www.seielect.com/Catalog/SEI-RMCF_RMCP.pdf, ComponentLink1URL=http://www.seielect.com/Catalog/SEI-RMCF_RMCP.pdf, Composition="Thick Film", Features=-, Height="0.016\" (0.40mm)", Number of Terminations=2, Packaging=Digi-Reel®, Pricing 1="1=0.04, 10=0.025, 50=0.0138, 100=0.0105, 250=0.0078, 500=0.00576, 1000=0.00384, 2500=0.00324, 5000=0.0027 (USD)", RoHS="RoHS Compliant", Size / Dimension="0.039\" L x 0.020\" W (1.00mm x 0.50mm)", Stock 1=280917, Supplier 1=Digi-Key
R52 R53: library part "RES SMD", "RES 10K OHM 1/16W 5% 0402 SMD", Manufacturer="Rohm Semiconductor", Manufacturer Part Number=MCR01MZPJ103, Package / Case="0402 (1005 Metric)", Power (Watts)="0.063W, 1/16W", Resistance (Ohms)=10k, Supplier Part Number 1=RHM10KJDKR-ND, Temperature Coefficient=±200ppm/°C, Tolerance=±5%, Category=Resistors, ComponentLink1Description=http://rohmfs.rohm.com/en/products/databook/datasheet/passive/resistor/chip_resistor/mcr_a.pdf, ComponentLink1URL=http://rohmfs.rohm.com/en/products/databook/datasheet/passive/resistor/chip_resistor/mcr_a.pdf, Composition="Thick Film", Features="Automotive AEC-Q200 Qualified", Height="0.016\" (0.40mm)", Number of Terminations=2, Packaging=Digi-Reel®, Pricing 1="1=0.1, 10=0.019, 25=0.014, 100=0.0078, 250=0.00596, 500=0.00476, 1000=0.0035, 5000=0.00251 (USD)", RoHS="RoHS Compliant", Size / Dimension="0.039\" L x 0.020\" W (1.00mm x 0.50mm)", Stock 1=452072, Supplier 1=Digi-Key, Supplier Device Package="0402 (1005 Metric)"
R55 R56 R57 R58 R59 R60 R61 R62 R63 R64 R65 R66 R67 R68 R69 R70 R80 R81 R82 R83 R84 R85 R86 R87 R88 R89 R90 R91 R92 R93 R94 R95 R165: library part RES_100K_1/16W_1%_0402, "RES 100K OHM 1/16W 1% 0402 SMD", Manufacturer="Stackpole Electronics Inc", Manufacturer Part Number=RMCF0402FT100K, Package / Case="0402 (1005 Metric)", Power (Watts)="0.063W, 1/16W", Resistance (Ohms)=100k, Supplier Device Package=0402, Supplier Part Number 1=RMCF0402FT100KDKR-ND, Temperature Coefficient=±100ppm/°C, Tolerance=±1%, Category=Resistors, ComponentLink1Description=http://www.seielect.com/Catalog/SEI-RMCF_RMCP.pdf, ComponentLink1URL=http://www.seielect.com/Catalog/SEI-RMCF_RMCP.pdf, Composition="Thick Film", Features=-, Height="0.016\" (0.40mm)", Number of Terminations=2, Packaging=Digi-Reel®, Pricing 1="1=0.04, 10=0.025, 50=0.0138, 100=0.0105, 250=0.0078, 500=0.00576, 1000=0.00384, 2500=0.00324, 5000=0.0027 (USD)", RoHS="RoHS Compliant", Size / Dimension="0.039\" L x 0.020\" W (1.00mm x 0.50mm)", Stock 1=851196, Supplier 1=Digi-Key
R75: library part "RES SMD", "RES 100 OHM 1/10W 5% 0402 SMD", Manufacturer="Panasonic Electronic Components", Manufacturer Part Number=ERJ-2RKF1000X, Package / Case="0402 (1005 Metric)", Power (Watts)="0.1W, 1/10W", Supplier Device Package=0402, Supplier Part Number 1=P100LDKR-ND, Temperature Coefficient=±100ppm/°C, Category=Resistors, ComponentLink1Description=http://industrial.panasonic.com/www-cgi/jvcr13pz.cgi?E+PZ+3+AOA0002+ERJ2RKF1000X+7+WW, ComponentLink1URL=http://industrial.panasonic.com/www-cgi/jvcr13pz.cgi?E+PZ+3+AOA0002+ERJ2RKF1000X+7+WW, Composition="Thick Film", Features=-, Height="0.016\" (0.40mm)", Number of Terminations=2, Packaging=Digi-Reel®, Pricing 1="1=0.1, 50=0.0242, 100=0.0184, 250=0.01364, 500=0.01008, 1000=0.00672, 5000=0.00473 (USD)", Resistance (Ohms)=100, RoHS=RoHS, Size / Dimension="0.039\" L x 0.020\" W (1.00mm x 0.50mm)", Stock 1=2375521, Supplier 1=Digi-Key
R97: library part RES_10K_1/16W_1%_0402, "RES 1.50K OHM 1/16W 1% 0402 SMD", Manufacturer=Yageo, Manufacturer Part Number=RC0402FR-071K5L, Package / Case="0402 (1005 Metric)", Power (Watts)="0.063W, 1/16W", Resistance (Ohms)=1.5k, Supplier Device Package=0402, Supplier Part Number 1=311-1.50KLRDKR-ND, Temperature Coefficient=±100ppm/°C, Tolerance=±1%, Category=Resistors, ComponentLink1Description=http://www.yageo.com/documents/recent/PYu-RC0402_51_RoHS_L_6.pdf, ComponentLink1URL=http://www.yageo.com/documents/recent/PYu-RC0402_51_RoHS_L_6.pdf, Composition="Thick Film", Features=-, Height="0.016\" (0.40mm)", Number of Terminations=2, Packaging=Digi-Reel®, Pricing 1="1=0.1, 10=0.014, 25=0.0104, 100=0.0063, 250=0.0054, 500=0.00382, 1000=0.0027, 2500=0.00234, 5000=0.00203 (USD)", RoHS="RoHS Compliant", Size / Dimension="0.039\" L x 0.020\" W (1.00mm x 0.50mm)", Stock 1=433921, Supplier 1=Digi-Key
R99: library part RES_10K_1/16W_1%_0402, "RES 240 OHM 1/10W 5% 0402 SMD", Manufacturer=Yageo, Manufacturer Part Number=RC0402FR-07240RL, Package / Case="0402 (1005 Metric)", Power (Watts)="0.063W, 1/16W", Resistance (Ohms)=240, Supplier Device Package=0402, Supplier Part Number 1=311-240LRDKR-ND, Temperature Coefficient=±100ppm/°C, Tolerance=±1%, Category=Resistors, ComponentLink1Description=http://www.yageo.com/documents/recent/PYu-RC0402_51_RoHS_L_6.pdf, ComponentLink1URL=http://www.yageo.com/documents/recent/PYu-RC0402_51_RoHS_L_6.pdf, Composition="Thick Film", Features=-, Height="0.016\" (0.40mm)", Number of Terminations=2, Packaging=Digi-Reel®, Pricing 1="1=0.1, 10=0.014, 25=0.0104, 100=0.0063, 250=0.0054, 500=0.00382, 1000=0.0027, 2500=0.00234, 5000=0.00203 (USD)", RoHS="RoHS Compliant", Size / Dimension="0.039\" L x 0.020\" W (1.00mm x 0.50mm)", Stock 1=39100, Supplier 1=Digi-Key
S1 S2 S3: library part KMR2, "Microminiature Tact Switch for SMT", Contact Rating @ Voltage="0.05A @ 32VDC", Illumination Type, Color=-, Manufacturer="C&K Components", Operating Force=300gf, Operating Temperature="-40°C ~ 85°C", Supplier Part Number 1=401-1429-6-ND, Actuator Height off PCB, from Pins=1.90mm, Actuator Material=-, Actuator Orientation="Top Actuated", Actuator Type=Standard, Category=Switches, Circuit=SPST-NO, ComponentLink1Description=http://www.ck-components.com/index.php?module=media&action=Display&cmpref=14414&lang=en&width=&height=&format=&alt=, ComponentLink1URL=http://www.ck-components.com/index.php?module=media&action=Display&cmpref=14414&lang=en&width=&height=&format=&alt=, Features="Grounding Pin", Illumination=Non-Illuminated, Illumination Voltage (Nominal)=-, Ingress Protection=-, Manufacturer Part Number=KMR231GLFS, Mechanical Life="150,000 Cycles", Mounting Type="Surface Mount", Outline="4.60mm x 2.80mm", Packaging=Digi-Reel®, Pricing 1="1=0.44, 10=0.416, 25=0.3744, 50=0.3326, 100=0.3188, 250=0.29108, 500=0.2772, 1000=0.22869 (USD)", RoHS="RoHS Compliant", Stock 1=32289, Supplier 1=Digi-Key, Switch Function=Off-Mom, Switch Travel=0.25mm, Termination Style="Gull Wing"
U1: library part PWR_TPS65217_2, "IC PMIC BATT PWR SYST 48VQFN", Current - Supply=-, Manufacturer="Texas Instruments", Manufacturer Part Number=TPS65217CRSLR, Operating Temperature="-40°C ~ 105°C", Package / Case="48-VFQFN Exposed Pad", Supplier Device Package="48-VQFN-EP (6x6)", Supplier Part Number 1=296-34814-6-ND, Voltage - Supply="2.75 V ~ 5.8 V", Applications="Battery Management, Display (LED Drivers), Handheld/Mobile Devices, Power Supply", Category="Integrated Circuits (ICs)", ComponentLink1Description=http://www.ti.com/lit/ds/symlink/tps65217c.pdf, ComponentLink1URL=http://www.ti.com/lit/ds/symlink/tps65217c.pdf, Mounting Type="Surface Mount", Packaging=Digi-Reel®, Pricing 1="1=8.01, 10=7.204, 25=6.5516, 100=4.1918, 250=4.11412, 500=4.0365, 750=3.95888 (USD)", RoHS="RoHS Compliant", Stock 1=0, Supplier 1=Digi-Key
U5: "SubArctic Cortex A8 Processor 15x15", Manufacturer="Texas Instruments", Manufacturer Part Number=XAM3359ZCZ, Mfr=TI, MfrNum="AM335x 15x15 FBGA ZCE", Package / Case=324-LFBGA, PartName=AM335X_15x15, Part Number=IC_AM335x_ZCE, Supplier Device Package=324-NFBGA(15x15), Supplier Part Number 1=296-35073-ND, TIIntPartnumber=1A0242, Voltage="1.06 V ~ 1.15 V", Category="Integrated Circuits (ICs)", ComponentLink1Description=http://www.ti.com/lit/ds/symlink/am3354.pdf, ComponentLink1URL=http://www.ti.com/lit/ds/symlink/am3354.pdf, Cost10K=10.00, Cost100=10.00, Features=-, Mounting Type="Surface Mount", Packaging=Tray, Pricing 1="1=33.5, 10=30.988, 100=26.465, 250=24.28752, 500=23.115, 1000=21.775, 2500=21.105, 5000=20.6025, 10000=20.1 (USD)", Processor Type="ARM Microprocessor", RoHS="RoHS Compliant", Speed=-, Stock 1=16, Supplier 1=Digi-Key, Vendor=Arrow
U7: "IC EEPROM 32KBIT 400KHZ SOT23-5", Manufacturer="Microchip Technology", Manufacturer Part Number=24LC32AT-I/OT, Operating Temperature="-40°C ~ 85°C", Package / Case="SC-74A, SOT-753", Supplier Device Package=SOT-23-5, Supplier Part Number 1=24LC32AT-I/OTDKR-ND, Voltage - Supply="2.5 V ~ 5.5 V", Category="Integrated Circuits (ICs)", ComponentLink1Description=http://ww1.microchip.com/downloads/en/DeviceDoc/21713M.pdf, ComponentLink1URL=http://ww1.microchip.com/downloads/en/DeviceDoc/21713M.pdf, Format - Memory="EEPROMs - Serial", Interface="I²C, 2-Wire Serial", Memory Size="32K (4K x 8)", Memory Type=EEPROM, Packaging=Digi-Reel®, Pricing 1="1=0.5, 10=0.32, 25=0.31, 100=0.3 (USD)", RoHS="RoHS Compliant", Speed=400kHz, Stock 1=8694, Supplier 1=Digi-Key
U9 U10: library part PROT_TPD4S012, "ESD 4channel USB Interface", Manufacturer="Texas Instruments", Manufacturer Part Number=TPD4S012DRYR, Mfr=TI, MfrNum=TPD4S012DRY, Package / Case=6-UFDFN, Power (Watts)=60W, Supplier Device Package="6-SON (1.45x1)", Supplier Part Number 1=296-24244-6-ND, TIIntPartnumber=1A0233, Voltage - Clamping=-, Applications=USB, Category="Circuit Protection", ComponentLink1Description=http://www.ti.com/lit/ds/symlink/tpd4s012.pdf, ComponentLink1URL=http://www.ti.com/lit/ds/symlink/tpd4s012.pdf, Cost10K=0.23, Cost100=0.76, Number of Circuits=4, Packaging=Digi-Reel®, PartName=TPD4S012, Pricing 1="1=0.78, 10=0.682, 25=0.6028, 100=0.2552, 250=0.25044, 500=0.2457, 750=0.24097 (USD)", RoHS="RoHS Compliant", Stock 1=7978, Supplier 1=Digi-Key, Technology="Mixed Technology", Vendor=Digikey, Voltage - Working=-
U12: library part MT41K256M16HA, "DDR2 SDRAM 2Gb (256Mx8)", Manufacturer="Micron Technology", Manufacturer Part Number=MT41K256M16HA-125:E, Package Quantity=1, Peak Solder Temperature="260 deg C", Supplier Part Number 1=52128708S9959891N2406, China ROHS Cadmium (X -> above / O -> below threshold)=O, China ROHS Hex Chromium (X -> above / O -> below threshold)=O, China ROHS Lead (X -> above / O -> below threshold)=O, China ROHS Mercury (X -> above / O -> below threshold)=O, China ROHS PBB (X -> above / O -> below threshold)=O, China ROHS PBDE (X -> above / O -> below threshold)=O, ComponentLink1Description=http://components.arrow.com/partservice/dataview/altium/52128708S9959891N2406?apiKey=aa438727d59eed98c4bed826d8d949c84cb5e685b92bf87346a0226bd2658797, ComponentLink1URL=http://components.arrow.com/partservice/dataview/altium/52128708S9959891N2406?apiKey=aa438727d59eed98c4bed826d8d949c84cb5e685b92bf87346a0226bd2658797, EU_ROHS_PROD_EXEMPTION_BY_SUPP=N/R, Lead Time="0 weeks", Pricing 1="0=10.09 (USD)", RoHS="CHINA ROHS: Compliant / EU ROHS: Compliant", Stock 1=0, Supplier 1=Arrow, Termination Finish=Sn/Ag/Cu
U13: library part eMMC, "Flash Card 2G-byte 3.3V MultiMedia Card 153-Pin WFBGA", Manufacturer="Micron Technology", Manufacturer Part Number="MTFC2GMVEA-0M WT", Package Quantity=1, Supplier Part Number 1=53710993S251949N2406, ComponentLink1Description=http://components.arrow.com/partservice/dataview/altium/53710993S251949N2406?apiKey=aa438727d59eed98c4bed826d8d949c84cb5e685b92bf87346a0226bd2658797, ComponentLink1URL=http://components.arrow.com/partservice/dataview/altium/53710993S251949N2406?apiKey=aa438727d59eed98c4bed826d8d949c84cb5e685b92bf87346a0226bd2658797, EU_ROHS_PROD_EXEMPTION_BY_SUPP=N/R, Lead Time="2 weeks", Pricing 1="0=7.21 (USD)", RoHS="CHINA ROHS: Compliant / EU ROHS: Compliant", Stock 1=1009, Supplier 1=Arrow
Y1: library part CRYS_32_768KHz_SMD32, "CRYSTAL 32.768KHZ 12.5PF SMD", ESR (Equivalent Series Resistance)="50 kOhm", Frequency Stability=-, Frequency Tolerance=±30ppm, Load Capacitance=12.5pF, Manufacturer="Citizen Finetech Miyota", Manufacturer Part Number=CM200C-32.768KAZF-UT, Operating Mode=Fundamental, Operating Temperature="-40°C ~ 85°C", Package / Case="4-SOJ, 5.50mm pitch", Supplier Part Number 1=300-8738-6-ND, Category="Crystals and Oscillators", ComponentLink1Description=http://cfm.citizen.co.jp/english/product/pdf/CM200C_250C.pdf, ComponentLink1URL=http://cfm.citizen.co.jp/english/product/pdf/CM200C_250C.pdf, Frequency=32.768kHz, Height="0.098\" (2.50mm)", Mounting Type="Surface Mount", Packaging=Digi-Reel®, Pricing 1="1=0.75, 10=0.65, 50=0.57, 100=0.45, 500=0.38, 1000=0.3 (USD)", Ratings=-, RoHS="RoHS Compliant", Size / Dimension="0.311\" L x 0.146\" W (7.90mm x 3.70mm)", Stock 1=0, Supplier 1=Digi-Key, Type="kHz Crystal (Tuning Fork)"